# Altium PCB ProgAdapter.PcbDoc
Units mm, origin at the board's own origin, x right, y up, seen from the top; angles counter-clockwise.
Board outline 50 x 103 mm, 2 copper layers (Top Layer, Bottom Layer); 31 components, 35 nets, 170 pads, 8 vias.
Unrouted connection lines stored in the file: 66.
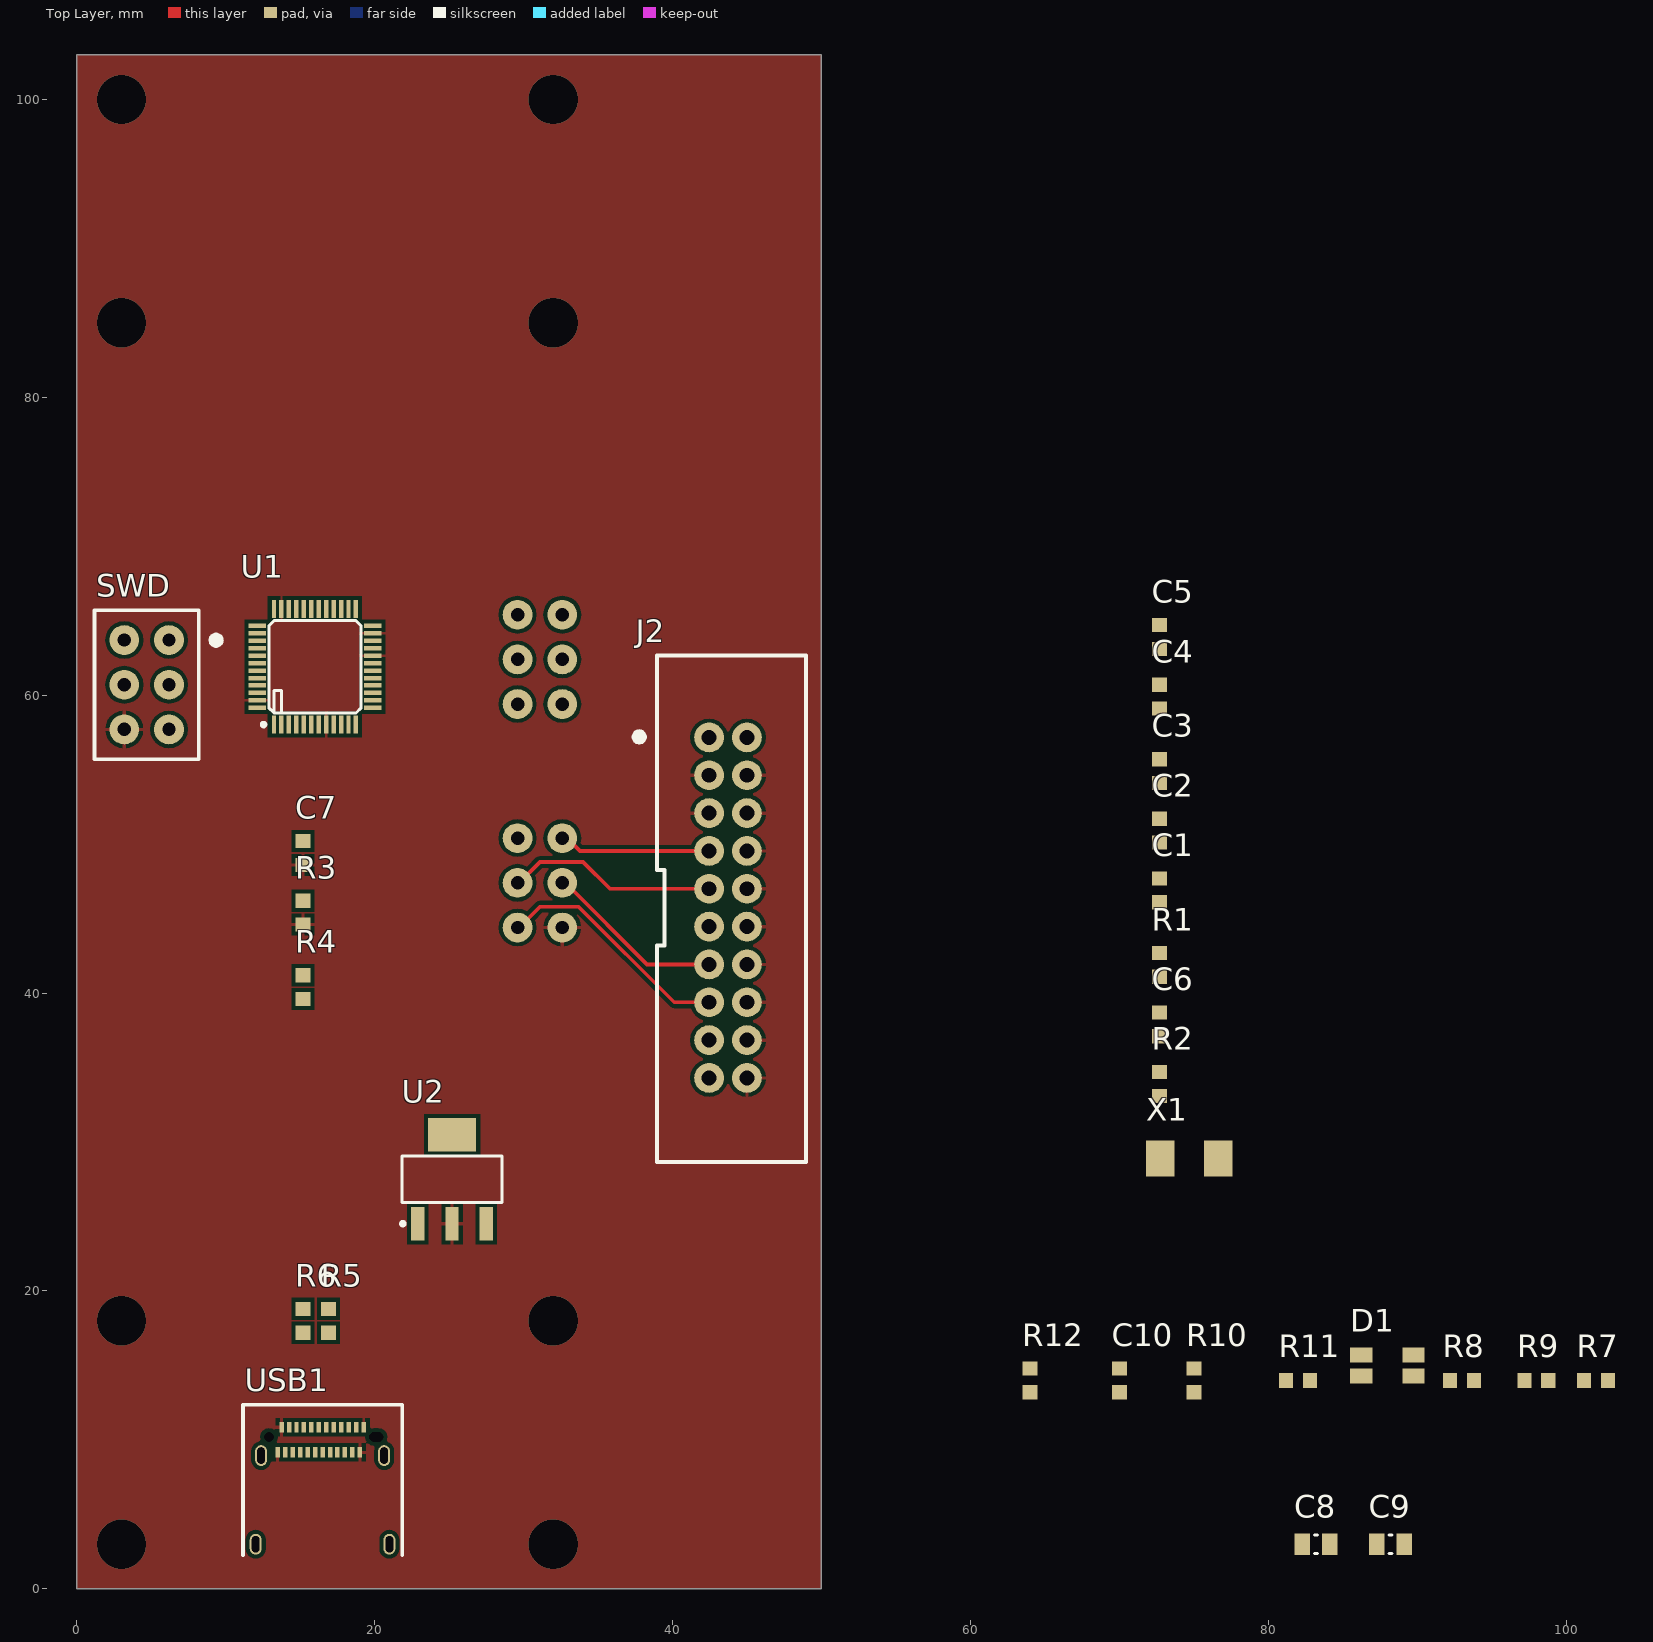
[diagram p0: Top Layer view]
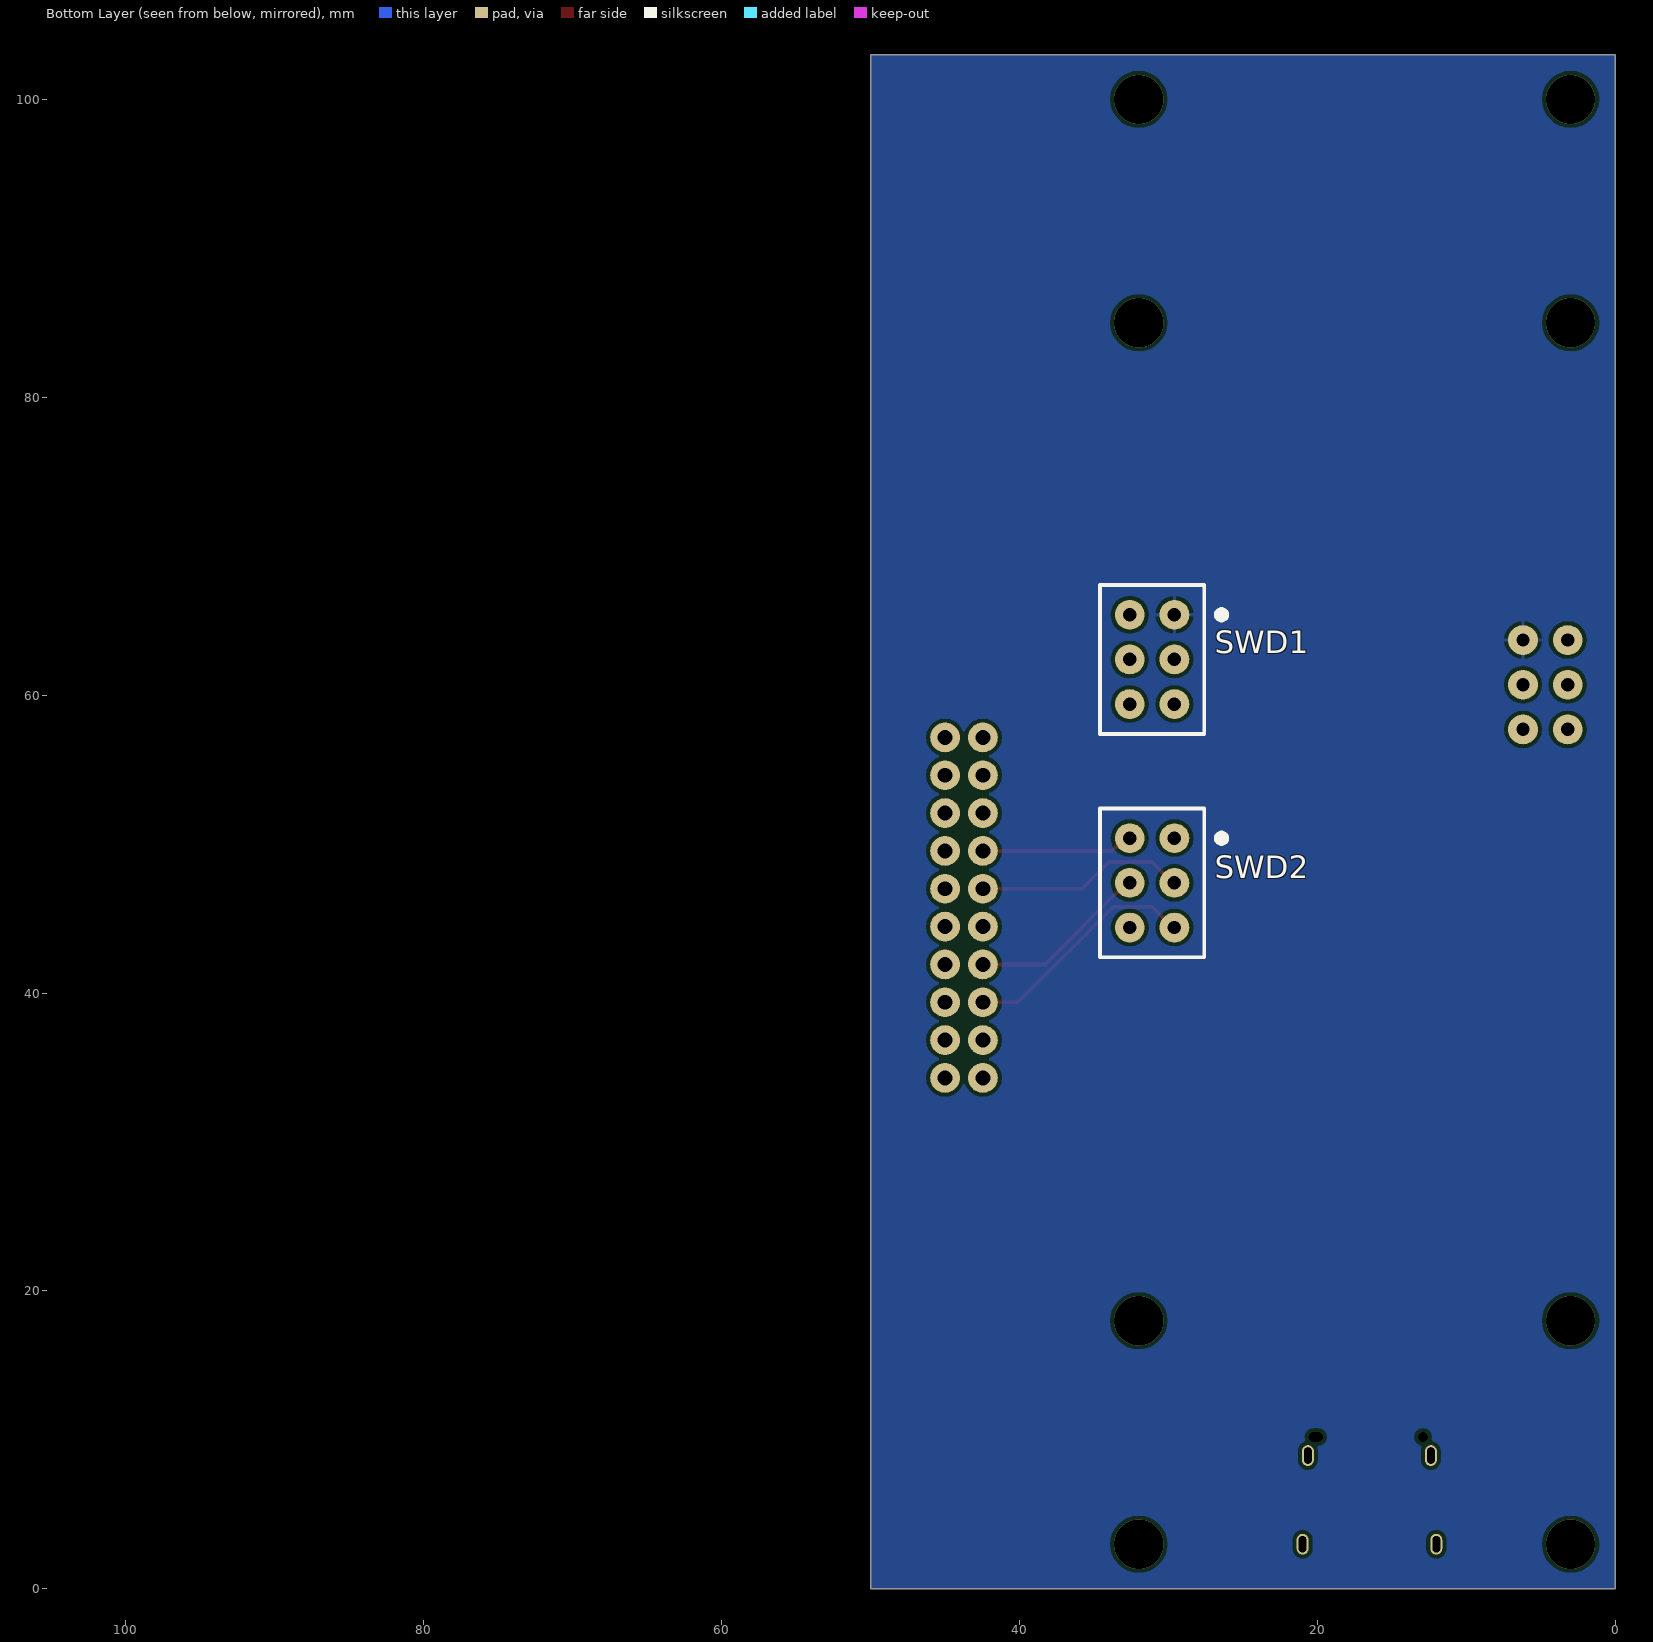
[diagram p1: Bottom Layer view, seen from below]

## Layer stack, top to bottom
Top Solder: solder mask 0.0102, Solder Resist, Dk 3.5
Top Layer: signal copper 0.0356
Dielectric 1: dielectric 0.32, FR-4, Dk 4.8
Bottom Layer: signal copper 0.0356
Bottom Solder: solder mask 0.0102, Solder Resist, Dk 3.5

## Board outline
0,0 50,0 50,103 0,103

## Design rules (kind name [scope] priority, off if disabled: settings)
Clearance [All] p1: gap=0.254 ignorepadtopadclearanceinfootprint=FALSE except(0: Arc-Hole Track-Hole SMDPad-Hole THPad-Hole Via-Hole Fill-Hole Poly-Hole Region-Hole Text-Hole)
HoleSize [All] p1: absolutevalues=TRUE maxlimit=6.3 minlimit=0.2 maxpercent=80.000 minpercent=20.000
PolygonConnect [All] p1: thpad.connectstyle=Relief thpad.reliefconductorwidth=0.254 thpad.reliefentries=4 thpad.polygonreliefangle="90 Angle" thpad.airgapwidth=0.254 smdpad.connectstyle=Relief smdpad.reliefconductorwidth=0.254 smdpad.reliefentries=4 smdpad.polygonreliefangle="90 Angle" smdpad.airgapwidth=0.254 via.connectstyle=Direct via.reliefconductorwidth=0.254 via.reliefentries=4 via.polygonreliefangle="90 Angle" via.airgapwidth=0.254
RoomDefinition Programadapter [InComponentClass('Programadapter')] p1: confinementstyle=ConfineIn formatcopy=TRUE lockcomponents=FALSE outline 0,0 50,0 50,103 0,103
RoutingVias [All] p1: holewidth=0.711 width=1 viastyle="Through Hole" minholewidth=0.2 minwidth=0.45 maxholewidth=6.3 maxwidth=7
SolderMaskExpansion [All] p1: expansion=0.102
Width [All] p1: maxlimit=0.254 minlimit=0.254 preferedwidth=0.254
29 further rules are at their usual default settings.

## Components (designator, comment, footprint, x,y, rotation, side; value= is the part's Value field where it differs from the comment)
C1 "Capacitor_0603" C_0603_Chip2PinSM127P600-8N 72.7,46.9 r90 top
C2 "Capacitor_0603" C_0603_Chip2PinSM127P600-8N 72.7,50.9 r90 top
C3 "Capacitor_0603" C_0603_Chip2PinSM127P600-8N 72.7,54.9 r90 top
C4 "Capacitor_0603" C_0603_Chip2PinSM127P600-8N 72.7,59.9 r90 top
C5 "Capacitor_0603" C_0603_Chip2PinSM127P600-8N 72.7,63.9 r90 top
C6 "Capacitor_0603" C_0603_Chip2PinSM127P600-8N 72.7,37.9 r90 top
C7 "Capacitor_0603" C_0603_Chip2PinSM127P600-8N 15.2,49.4 r90 top
C8 "Capacitor_0805" 10uF_0805_Chip2PinSM127P600-8N 83.2,3 r0 top
C9 "Capacitor_0805" 10uF_0805_Chip2PinSM127P600-8N 88.2,3 r0 top
C10 "Capacitor_0603" C_0603_Chip2PinSM127P600-8N 70,14 r90 top
D1 "LTST_LED_RED_GREEN" LTST_LED_GREEN_RED 88,15 r0 top
J2 "JTAG_Header" JTAG_Header 42.46,57.16 r270 top
R1 "Resistor_0603" R_0603_Chip2PinSM127P600-8N 72.7,41.9 r90 top
R2 "Resistor_0603" R_0603_Chip2PinSM127P600-8N 72.7,33.9 r90 top
R3 "Resistor_0603" R_0603_Chip2PinSM127P600-8N 15.2,45.4 r90 top
R4 "Resistor_0603" R_0603_Chip2PinSM127P600-8N 15.2,40.4 r90 top
R5 "Resistor_0603" R_0603_Chip2PinSM127P600-8N 16.9,18 r90 top
R6 "Resistor_0603" R_0603_Chip2PinSM127P600-8N 15.2,18 r90 top
R7 "Resistor_0603" R_0603_Chip2PinSM127P600-8N 102,14 r0 top
R8 "Resistor_0603" R_0603_Chip2PinSM127P600-8N 93,14 r0 top
R9 "Resistor_0603" R_0603_Chip2PinSM127P600-8N 98,14 r0 top
R10 "Resistor_0603" R_0603_Chip2PinSM127P600-8N 75,14 r90 top
R11 "Resistor_0603" R_0603_Chip2PinSM127P600-8N 82,14 r0 top
R12 "Resistor_0603" R_0603_Chip2PinSM127P600-8N 64,14 r90 top
SWD "ProgrammingHeader" ProgrammingHeader 6.2,63.7 r270 top
SWD1 "ProgrammingHeader" ProgrammingHeader 29.6,65.4 r270 bottom
SWD2 "ProgrammingHeader" ProgrammingHeader 29.6,50.4 r270 bottom
U1 "STM32F103C8T6" STM32F103CBT_LQFP48 16,61.9 r90 top
U2 "MIC2920A" MIC2920A_SOT230P710X170-4N 25.2,27.5 r90 top
USB1 "USB-C_simplified" USB-C_receptacle 13.76,10.86 r0 top
X1 "Crystal_8MHz" Crystal_8MHz 74.7,28.9 r180 top

## Footprints (in the part's own frame and the unit in brackets; to place one, negate y for a bottom-side part, rotate by r counter-clockwise, add the part's x,y. Pads: shape width x height; smd on the part's side, far side on the other; paste and mask are expansions set on the pad)
10uF_0805_Chip2PinSM127P600-8N [mm]
  rect 1.05x1.45 smd: 1(-0.925,0) 2(0.925,0)
  silkscreen extent -0.1,-0.63 0.1,0.63, body extent -1.07,-0.7 1.07,0.7, height 1.4
C_0603_Chip2PinSM127P600-8N [mm]
  rect 0.95x1 smd: 1(-0.8,0) 2(0.8,0)
  body extent -0.9,-0.5 0.9,0.5, height 1
Crystal_8MHz [mm]
  rect 1.9x2.4 smd: 1(-1.95,0) 2(1.95,0)
  body extent -2.5,-1.6 2.5,1.6, height 1.4
JTAG_Header [mm]
  round 2 hole 1 mask+0.05: 1(0,0) 2(0,2.54) 3(2.54,0) 4(2.54,2.54) 5(5.08,0) 6(5.08,2.54) 7(7.62,0) 8(7.62,2.54) 9(10.16,0) 10(10.16,2.54) 11(12.7,0) 12(12.7,2.54) 13(15.24,0) 14(15.24,2.54) 15(17.78,0) 16(17.78,2.54) 17(20.32,0) 18(20.32,2.54) 19(22.86,0) 20(22.86,2.54)
  silkscreen extent -5.5,-5.19 28.5,6.5, body extent -5.07,-2.97 27.92,5.84, height 8.89
LTST_LED_GREEN_RED [mm]
  rect 1.5x1 smd: 1(-1.75,0.7) 2(-1.75,-0.7) 3(1.75,0.7) 4(1.75,-0.7)
  body extent -1.55,-1.35 1.65,1.35, height 1.1
MIC2920A_SOT230P710X170-4N [mm] "SOT223, 4-Leads, Body 6.50x7.10mm (avg), Pitch 2.30mm, IPC Medium Density"
  rect 2.25x0.9 smd: 1(-2.98,2.3) 2(-2.98,0) 3(-2.98,-2.3)
  rect 2.25x3.25 smd: 4(2.98,0)
  silkscreen extent -3.1,-3.35 1.55,3.42, body extent -3.55,-3.35 3.55,3.35, height 1.7
ProgrammingHeader [mm]
  round 2 hole 0.9 mask+0.05: 1(0,0) 2(0,-3) 3(3,0) 4(3,-3) 5(6,0) 6(6,-3)
  silkscreen extent -2,-5 8,3.66
R_0603_Chip2PinSM127P600-8N [mm]
  rect 0.95x1 smd: 1(-0.8,0) 2(0.8,0)
  body extent -0.9,-0.5 0.9,0.5, height 1
STM32F103CBT_LQFP48 [mm]
  rect 1.2x0.3 smd: 1(-3.875,2.75) 2(-3.875,2.25) 3(-3.875,1.75) 4(-3.875,1.25) 5(-3.875,0.75) 6(-3.875,0.25) 7(-3.875,-0.25) 8(-3.875,-0.75) 9(-3.875,-1.25) 10(-3.875,-1.75) 11(-3.875,-2.25) 12(-3.875,-2.75) 25(3.875,-2.75) 26(3.875,-2.25) 27(3.875,-1.75) 28(3.875,-1.25) 29(3.875,-0.75) 30(3.875,-0.25) 31(3.875,0.25) 32(3.875,0.75) 33(3.875,1.25) 34(3.875,1.75) 35(3.875,2.25) 36(3.875,2.75)
  rect 0.3x1.2 smd: 13(-2.75,-3.875) 14(-2.25,-3.875) 15(-1.75,-3.875) 16(-1.25,-3.875) 17(-0.75,-3.875) 18(-0.25,-3.875) 19(0.25,-3.875) 20(0.75,-3.875) 21(1.25,-3.875) 22(1.75,-3.875) 23(2.25,-3.875) 24(2.75,-3.875) 37(2.75,3.875) 38(2.25,3.875) 39(1.75,3.875) 40(1.25,3.875) 41(0.75,3.875) 42(0.25,3.875) 43(-0.25,3.875) 44(-0.75,3.875) 45(-1.25,3.875) 46(-1.75,3.875) 47(-2.25,3.875) 48(-2.75,3.875)
  silkscreen extent -4,-3.1 3.1,3.57, body extent -4.6,-4.6 4.6,4.6, height 1.55
USB-C_receptacle [mm]
  rect 0.3x0.7 smd mask+0.05: A1(0,0) A2(0.5,0) A3(1,0) A4(1.5,0) A5(2,0) A6(2.5,0) A7(3,0) A8(3.5,0) A9(4,0) A10(4.5,0) A11(5,0) A12(5.5,0) B1(5.25,-1.7) B2(4.75,-1.7) B3(4.25,-1.7) B4(3.75,-1.7) B5(3.25,-1.7) B6(2.75,-1.7) B7(2.25,-1.7) B8(1.75,-1.7) B9(1.25,-1.7) B10(0.75,-1.7) B11(0.25,-1.7) B12(-0.25,-1.7)
  rrect100% 0.8x1.4 hole 0.5 slot 1.1 at 90 deg mask+0.05: S1(-1.38,-1.91) S2(6.88,-1.91) S3(-1.74,-7.86) S4(7.24,-7.86)
  round 0.3 hole 0.65 mask+0.05: ""(-0.85,-0.66)
  round 0.3 hole 0.65 slot 0.95 at 0 deg mask+0.05: ""(6.35,-0.66)
  silkscreen extent -2.6,-8.6 8.1,1.5, body extent -1.85,-10.25 7.35,0.3, height 3.25

## Part data
C1 C2 C3 C4 C5 C10: Capacity=100nF
C6 C7: Capacity=16pF
C8 C9: Capacity=10µF
R1 R2 R5 R6: Resistance=22
R3: Resistance=10k
R4: Resistance=1k5
R7 R12: Resistance=50
R8 R11: Resistance=100k
R9 R10: Resistance=4k7
U2: library part MIC2920_3V3_VoltageReg, ComponentLink1Description=Datasheet, ComponentLink1URL=http://ww1.microchip.com/downloads/en/DeviceDoc/mic2920.pdf, ComponentLink2Description="MIC2920A-3.3WS-TR - Digikey", ComponentLink2URL=https://www.digikey.ch/product-detail/de/microchip-technology/MIC2920A-3.3WS-TR/576-1116-1-ND/771849
USB1: "USB Type C receptacle simplified with just data and supply pins", ComponentLink1Description="Datasheet (Drawing)", ComponentLink1URL=https://www.amphenol-icc.com/media/wysiwyg/files/drawing/12401610e4x2a.pdf, ComponentLink2Description="USB - C, USB 3.1 Gen 2 - Digikey", ComponentLink2URL=https://www.digikey.ch/product-detail/de/amphenol-icc-commercial-products/12401610E4-2A/12401610E4-2ACT-ND/5775520
X1: "8MHz Crystall SMD", ComponentLink1Description=Datasheet, ComponentLink1URL=https://ecsxtal.com/store/pdf/ecx-53r.pdf, ComponentLink2Description="ECS-.327-6-34QCN-TR - Digikey", ComponentLink2URL=https://www.digikey.ch/product-detail/de/ecs-inc/ECS-80-18-30-JGN-TR/XC2103CT-ND/5875587

## Via types
v1: diameter 3.3, hole 3.3, Top Layer to Bottom Layer, 8 vias

## Nets (pads, with @x,y where several pads share a name; then routed paths per layer and width w, separated by ;. In a path a pad name is that pad's centre, name@x,y a point inside that pad or via, vN(x,y) a via of type N, cw(c..) or ccw(c..) an arc to the next point about the centre after c; other vN are vias at no path point)
3.3V: C1.1 C2.1 C3.1 C4.1 C5.1 C9.1 R4.2 R7.2 R8.2 R9.2 SWD1.1 SWD.1 U1.1 U1.9 U1.24 U1.36 U1.48 U2.3
3V3: J2.1 J2.2 SWD2.1
+5: C8.1 U2.1 USB1.A4 USB1.A9 USB1.B4 USB1.B9
BOOT0: R11.2 U1.44
GND: C1.2 C2.2 C3.2 C4.2 C5.2 C6.1 C7.1 C8.2 C9.2 C10.2 J2.3 J2.4 J2.5 J2.6 J2.8 J2.10 J2.12 J2.14 J2.16 J2.18 J2.20 R3.1 R10.1 R11.1 R12.1 SWD2.6 SWD.6 U1.8 U1.20 U1.23 U1.35 U1.47 U2.2 USB1.A1 USB1.A12 USB1.B1 USB1.B12
  other v1: 3,3 32,3 3,18 32,18 3,85 32,85 3,100 32,100
JTAG_CTL: U1.4
LED: D1.2 D1.4 U1.29
NetD1_1: D1.1 R7.1
NetD1_3: D1.3 R12.2
NetR1_1: R1.1 SWD1.2
NetR2_2: R2.2 SWD1.3
NetR3_2: R3.2 SWD1.6
NetR5_1: R5.1 USB1.A7 USB1.B7
NetR6_1: R6.1 USB1.A6 USB1.B6
NRST: J2.15 SWD2.5 | length 16.1
  Top Layer w0.254: SWD2.5@29.6,44.3 31.1,45.8 33.7,45.8 40.12,39.38 J2.15
OSC_IN: C6.2 U1.5 X1.2
OSC_OUT: C7.2 U1.6 X1.1
PA0: R9.1 R10.2 U1.10
RST: C10.1 R8.1 SWD.5 U1.7
STM_JRST: U1.40
STM_JTCK: SWD.3 U1.37
STM_JTDI: U1.38
STM_JTDO: SWD.4 U1.39
STM_JTMS: SWD.2 U1.34
SWCLK: J2.9 SWD2.3 | length 14.2
  Top Layer w0.254: SWD2.3@29.6,47.3 31.1,48.8 34,48.8 35.8,47 J2.9
SWDIO: J2.7 SWD2.2 | length 10.2
  Top Layer w0.254: SWD2.2@32.6,50.3 33.033,50.3 33.793,49.54 J2.7
T_JRST: SWD1.5 U1.19
T_JTCK: R2.1 U1.15 U1.26
T_JTDI: U1.17
T_JTDO: U1.16
T_JTMS: R1.2 U1.27
T_NRST: U1.18
TRACESWO: J2.13 SWD2.4 | length 12.1
  Top Layer w0.254: SWD2.4@32.6,47.3 32.918,47.3 38.298,41.92 J2.13
USB_DM: R5.2 U1.32
USB_DP: R4.1 R6.2 U1.33
pads on no net: J2.11 J2.17 J2.19 SWD1.4 U1.2 U1.3 U1.11 U1.12 U1.13 U1.14 U1.21 U1.22 U1.25 U1.28 U1.30 U1.31 U1.41 U1.42 U1.43 U1.45 U1.46 U2.4 USB1. USB1.A2 USB1.A3 USB1.A5 USB1.A8 USB1.A10 USB1.A11 USB1.B2 USB1.B3 USB1.B5 USB1.B8 USB1.B10 USB1.B11 USB1.S1 USB1.S2 USB1.S3 USB1.S4

## Polygon pours and split planes (outlines as drawn)
3.3V on Bottom Layer "Bottom Layer-3.3V" (solid, pour order 2): 0,0 50,0 50,103 0,103
GND on Top Layer "Top Layer-GND" (solid, remove dead copper, pour order 0): 0,0 50,0 50,103 0,103

## Silkscreen, mask and mechanical layers (free items; w line width, h text height)
Outline:
  the board outline again, w0.1